# Altium PCB BlueBox-Amp.PcbDoc
Units mm, origin at the board's own origin, x right, y up, seen from the top; angles counter-clockwise.
Board outline 100 x 100 mm, 2 copper layers (Top Layer, Bottom Layer); 50 components, 36 nets, 135 pads, 0 vias.
Unrouted connection lines stored in the file: 93.
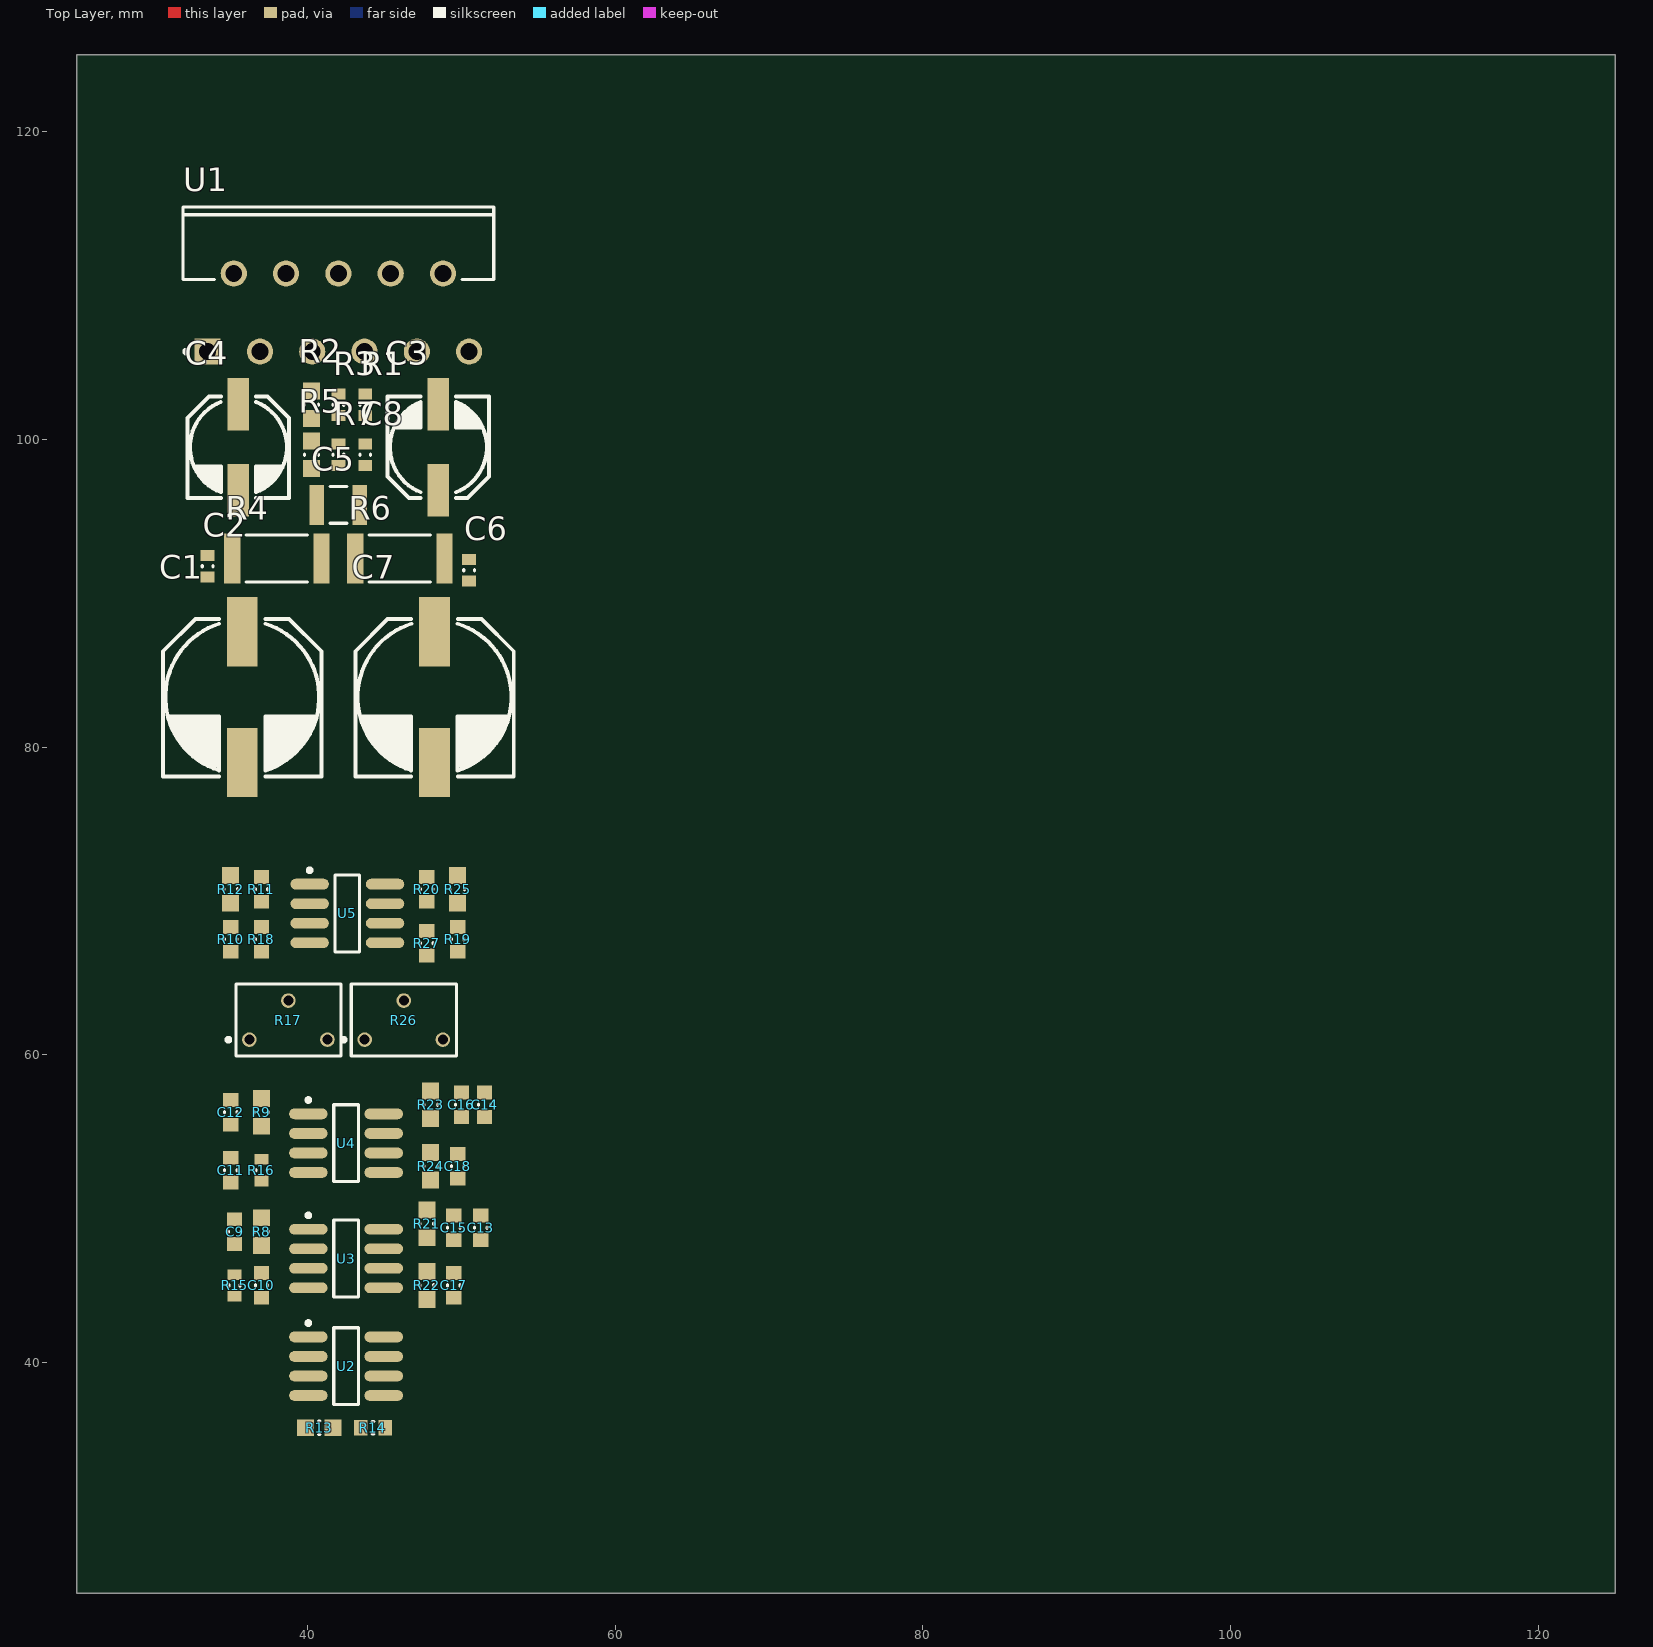
[diagram p0: Top Layer view]
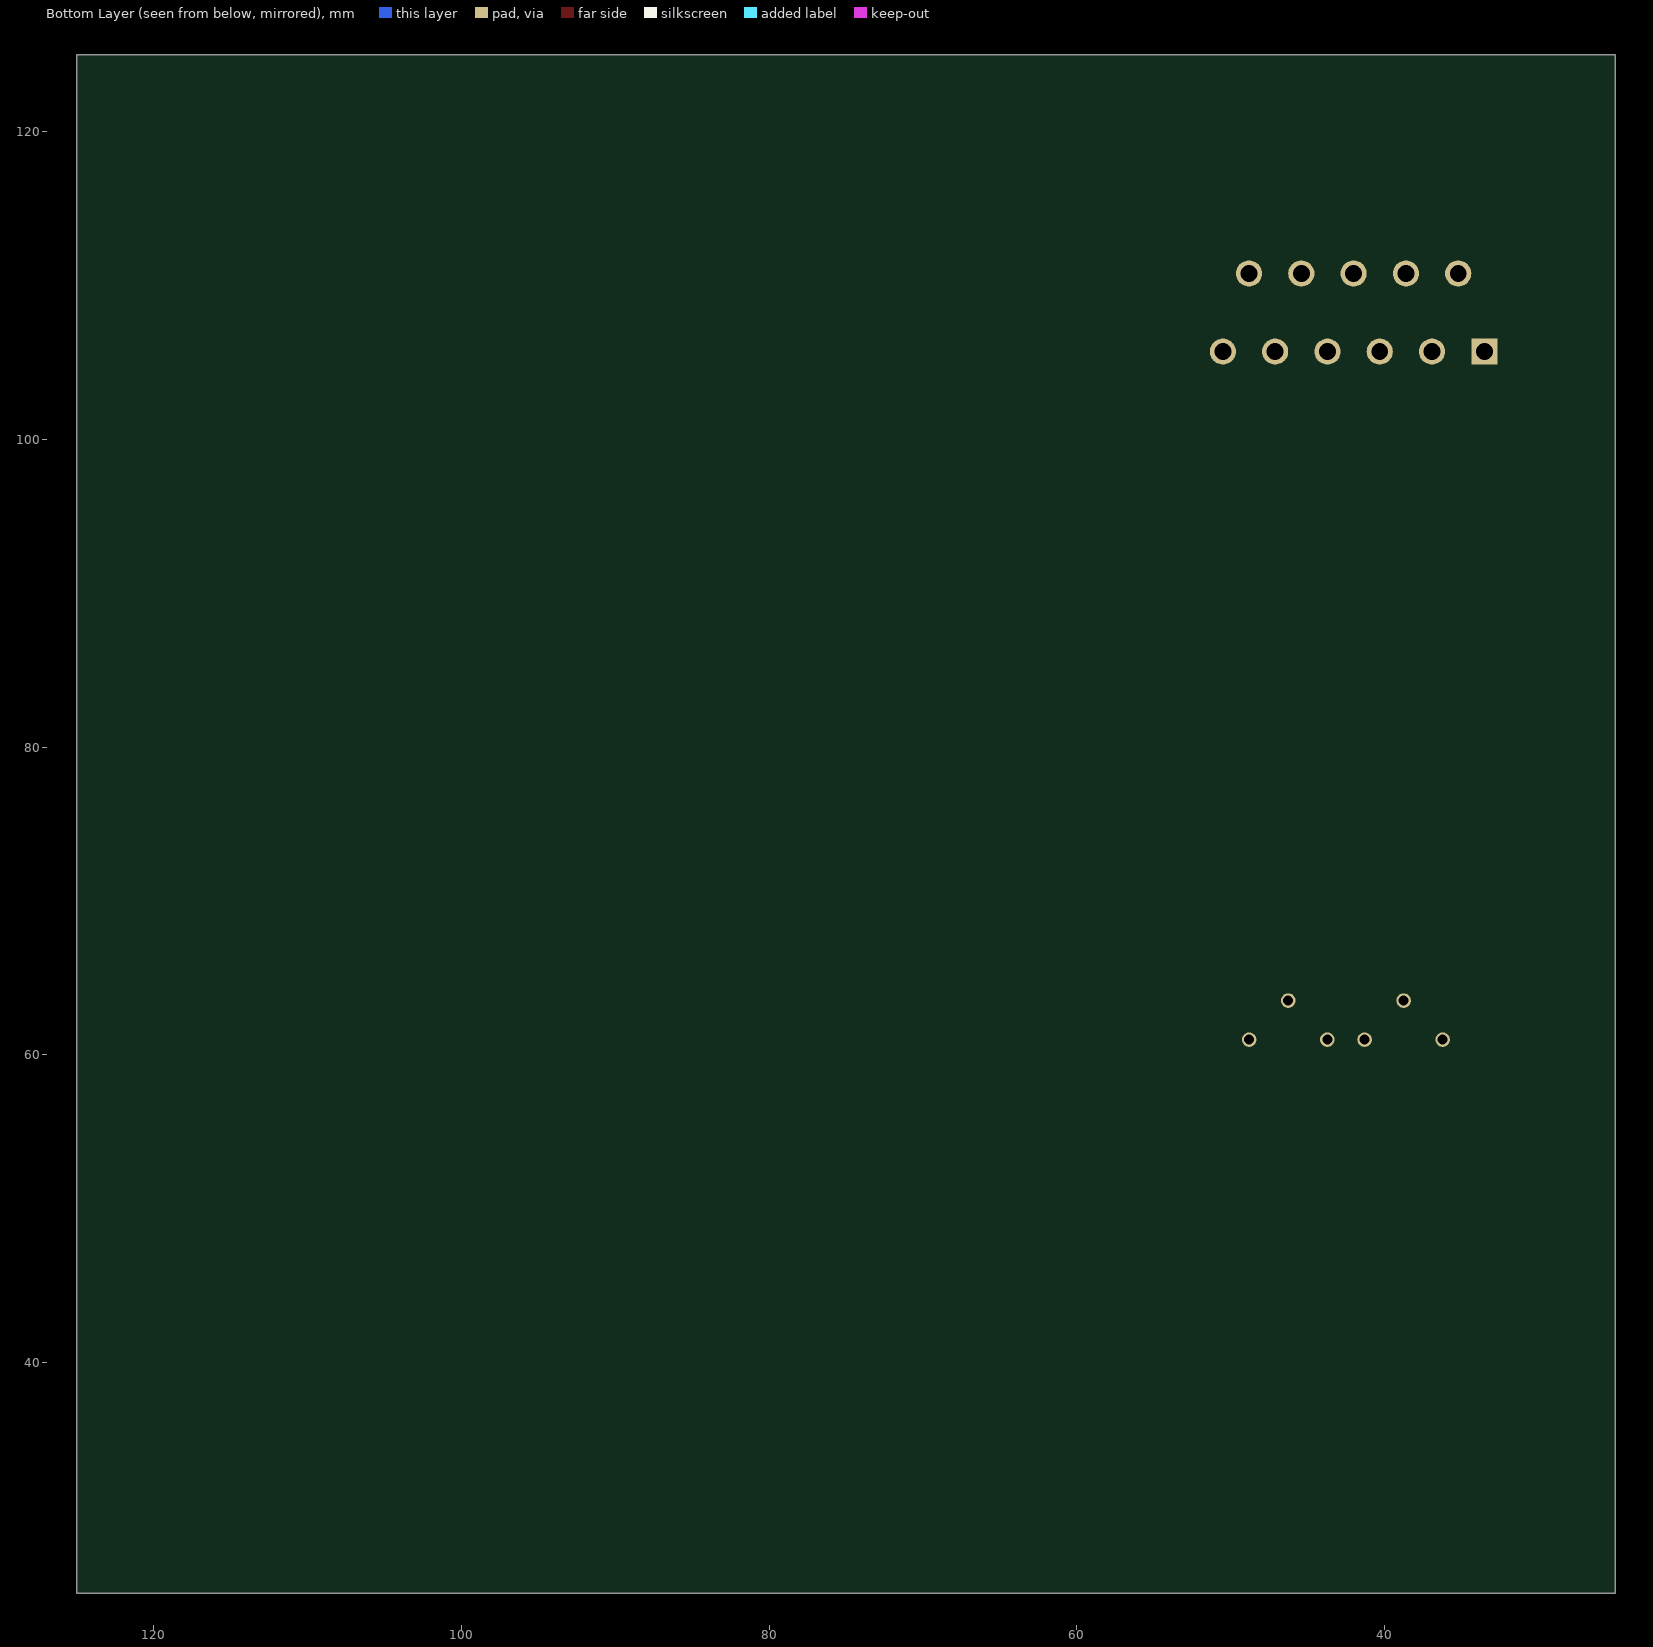
[diagram p1: Bottom Layer view, seen from below]

## Layer stack, top to bottom
Top Solder: solder mask 0.0102, Solder Resist, Dk 3.5
Top Layer: signal copper 0.0356
Dielectric 1: dielectric 0.32, FR-4, Dk 4.8
Bottom Layer: signal copper 0.0356
Bottom Solder: solder mask 0.0102, Solder Resist, Dk 3.5

## Board outline
25,25 125,25 125,125 25,125

## Design rules (kind name [scope] priority, off if disabled: settings)
Clearance [All] p1: gap=0.254
PolygonConnect [All] p1: connectstyle=Relief reliefconductorwidth=0.254 reliefentries=4 polygonreliefangle="90 Angle" airgapwidth=0.254
RoomDefinition "BlueBox-Amp [CrossOver]" [InComponentClass('BlueBox-Amp [CrossOver]')] p1: confinementstyle=ConfineIn formatcopy=TRUE lockcomponents=FALSE outline 31.75,33.5 53,33.5 53,73.5 31.75,73.5
RoomDefinition "BlueBox-Amp [PA]" [InComponentClass('BlueBox-Amp [PA]')] p2: confinementstyle=ConfineIn formatcopy=TRUE lockcomponents=FALSE outline 54.5,75.75 54.5,115.75 29.5,115.75 29.5,75.75
RoutingVias [All] p1: holewidth=0.711 width=1.27 viastyle="Through Hole" minholewidth=0.711 minwidth=1.27 maxholewidth=0.711 maxwidth=1.27
SolderMaskExpansion [All] p1: expansion=0.102
Width [All] p1: maxlimit=0.254 minlimit=0.254 preferedwidth=0.254
30 further rules are at their usual default settings.

## Classes and differential pairs
component class "BlueBox-Amp [PA]": C1 C2 C3 C4 C5 C6 C7 C8 R1 R2 R3 R4 R5 R6 R7 U1
component class "BlueBox-Amp [CrossOver]": C9 C10 C11 C12 C13 C14 C15 C16 C17 C18 R8 R9 R10 R11 R12 R13 R14 R17 R18 R19 R20 R21 R22 R23 R24 R25 R26 R27 U2 U3 U4 U5 U6

## Components (designator, comment, footprint, x,y, rotation, side; value= is the part's Value field where it differs from the comment)
C1 "220uF" "SMD Panasonic K" 35.75,83.25 r90 top
C2 "CAP 100nF 50V 0603(1608)" CAPC0603(1608)100_L 33.5,91.75 r270 top
C3 "22uF" "SMD Panasonic D" 48.5,99.5 r270 top
C4 "22uF" "SMD Panasonic D" 35.5,99.5 r90 top
C5 "CAP 3.3uF 50V 1210(3225)" CAPC1210(3225)280_L 42,95.75 r180 top
C6 "CAP 100nF 50V 0603(1608)" CAPC0603(1608)100_L 50.5,91.5 r270 top
C7 "220uF" "SMD Panasonic K" 48.25,83.25 r90 top
C8 "CAP 100nF 50V 0603(1608)" CAPC0603(1608)100_L 43.75,99 r90 top
C9 "CAP 33nF 50V 0603(1608)" CAPC0603(1608)100_N 35.25,48.5 r270 top
C10 "CAP 33nF 50V 0603(1608)" CAPC0603(1608)100_N 37,45 r270 top
C11 "CAP 33nF 50V 0603(1608)" CAPC0603(1608)100_N 35,52.5 r90 top
C12 "CAP 33nF 50V 0603(1608)" CAPC0603(1608)100_N 35,56.25 r270 top
C13 "CAP 33nF 50V 0603(1608)" CAPC0603(1608)100_N 51.25,48.75 r270 top
C14 "CAP 33nF 50V 0603(1608)" CAPC0603(1608)100_N 51.5,56.75 r270 top
C15 "CAP 33nF 50V 0603(1608)" CAPC0603(1608)100_N 49.5,48.75 r270 top
C16 "CAP 33nF 50V 0603(1608)" CAPC0603(1608)100_N 50,56.75 r270 top
C17 "CAP 33nF 50V 0603(1608)" CAPC0603(1608)100_N 49.5,45 r270 top
C18 "CAP 33nF 50V 0603(1608)" CAPC0603(1608)100_N 49.75,52.75 r270 top
R1 "22K 1% 0603(1608)" RESC0603(1608)_L 43.75,102.25 r90 top
R2 "1K 1% 0603(1608)" RESC0603(1608)_M 40.25,102.25 r270 top
R3 "22K 1% 0603(1608)" RESC0603(1608)_L 42,102.25 r90 top
R4 "10R 5% 2512(6432)" RESC2512(6432)_L 38,92.25 r180 top
R5 "1K 1% 0603(1608)" RESC0603(1608)_M 40.25,99 r90 top
R6 "2R7 5% 2512(6432)" RESC2512(6432)_L 46,92.25 r180 top
R7 "22K 1% 0603(1608)" RESC0603(1608)_L 42,99 r90 top
R8 "11K 1% 0603(1608)" RESC0603(1608)_M 37,48.5 r90 top
R9 "11K 1% 0603(1608)" RESC0603(1608)_M 37,56.25 r270 top
R10 "10K 1% 0603(1608)" RESC0603(1608)_N 35,67.5 r90 top
R11 "10K 1% 0603(1608)" RESC0603(1608)_N 37,70.75 r90 top
R12 "100R 1% 0603(1608)" RESC0603(1608)_M 35,70.75 r90 top
R13 "1K 1% 0603(1608)" RESC0603(1608)_M 40.75,35.75 r0 top
R14 "100K 1% 0603(1608)" RESC0603(1608)_N 44.25,35.75 r180 top
R15 "22K 1% 0603(1608)" RESC0603(1608)_L 35.25,45 r270 top
R16 "22K 1% 0603(1608)" RESC0603(1608)_L 37,52.5 r90 top
R17 "3266W-1-104LF" BOUR-3266W-3_V 38.75,62.25 r0 top
R18 "10K 1% 0603(1608)" RESC0603(1608)_N 37,67.5 r90 top
R19 "10K 1% 0603(1608)" RESC0603(1608)_N 49.75,67.5 r90 top
R20 "10K 1% 0603(1608)" RESC0603(1608)_N 47.75,70.75 r90 top
R21 "11K 1% 0603(1608)" RESC0603(1608)_M 47.75,49 r270 top
R22 "11K 1% 0603(1608)" RESC0603(1608)_M 47.75,45 r270 top
R23 "11K 1% 0603(1608)" RESC0603(1608)_M 48,56.75 r270 top
R24 "11K 1% 0603(1608)" RESC0603(1608)_M 48,52.75 r270 top
R25 "100R 1% 0603(1608)" RESC0603(1608)_M 49.75,70.75 r90 top
R26 "3266W-1-104LF" BOUR-3266W-3_V 46.25,62.25 r0 top
R27 "10K 1% 0603(1608)" RESC0603(1608)_N 47.75,67.25 r90 top
U1 "LM3886TF/NOPB" TI-NDA11 42,108.25 r90 top
U2 "NE5532D" TI-D8_M 42.5,39.75 r0 top
U3 "NE5532D" TI-D8_M 42.5,46.75 r0 top
U4 "NE5532D" TI-D8_M 42.5,54.25 r0 top
U5 "NE5532D" TI-D8_M 42.583,69.187 r0 top

## Footprints (in the part's own frame and the unit in brackets; to place one, negate y for a bottom-side part, rotate by r counter-clockwise, add the part's x,y. Pads: shape width x height; smd on the part's side, far side on the other; paste and mask are expansions set on the pad)
BOUR-3266W-3_V [mm] "THD, 3-Leads, Body 6.6x4.69mm, Pitch 2.54mm"
  round 0.95 hole 0.65: 1(-2.54,-1.27) 2(0,1.27) 3(2.54,-1.27)
  silkscreen extent -4.02,-2.34 3.42,2.34, body extent -3.3,-2.35 3.3,2.35, height 8.51
CAPC0603(1608)100_L [mm] "Chip Capacitor, Body 1.6x0.8mm, Height 1.0mm, IPC High Density"
  rect 0.7x0.9 smd: 1(-0.7,0) 2(0.7,0)
  silkscreen extent -0.05,-0.35 0.05,0.35, body extent -0.87,-0.47 0.88,0.48, height 1
CAPC0603(1608)100_N [mm] "Chip Capacitor, Body 1.6x0.8mm, Height 1.0mm, IPC Medium Density"
  rect 0.9x1 smd: 1(-0.8,0) 2(0.8,0)
  silkscreen extent -0.05,-0.4 0.05,0.4, body extent -0.87,-0.48 0.88,0.47, height 1
CAPC1210(3225)280_L [mm] "Chip Capacitor, Body 3.2x2.5mm, Height 2.8mm, IPC High Density"
  rect 0.95x2.6 smd: 1(-1.4,0) 2(1.4,0)
  silkscreen extent -0.55,-1.2 0.55,1.2, body extent -1.7,-1.4 1.7,1.4, height 2.8
RESC0603(1608)_L [mm] "Chip Resistor, Body 1.6x0.8mm, IPC High Density"
  rect 0.7x0.9 smd: 1(-0.7,0) 2(0.7,0)
  silkscreen extent -0.05,-0.35 0.05,0.35, body extent -0.85,-0.47 0.85,0.47, height 0.6
RESC0603(1608)_M [mm] "Chip Resistor, Body 1.6x0.8mm, IPC Low Density"
  rect 1.1x1.1 smd: 1(-0.9,0) 2(0.9,0)
  silkscreen extent -0.05,-0.45 0.05,0.45, body extent -0.85,-0.47 0.85,0.47, height 0.6
RESC0603(1608)_N [mm] "Chip Resistor, Body 1.6x0.8mm, IPC Medium Density"
  rect 0.9x1 smd: 1(-0.8,0) 2(0.8,0)
  silkscreen extent -0.05,-0.4 0.05,0.4, body extent -0.85,-0.47 0.85,0.47, height 0.6
RESC2512(6432)_L [mm] "Chip Resistor, Body 6.4x3.2mm, IPC High Density"
  rect 1.05x3.25 smd: 1(-2.9,0) 2(2.9,0)
  silkscreen extent -2,-1.52 2,1.53, body extent -3.25,-1.7 3.25,1.7, height 0.75
"SMD Panasonic D" [mm] "SMD Aluminum Electrolytic Capacitor,Panasonic D (105C), Body 6.3x5.3mm"
  rect 3.4x1.4 smd: 1(2.794,0) 2(-2.794,0)
  silkscreen extent -3.3,-3.3 3.3,3.3, body extent -3.5,-3.3 3.5,3.3, height 5.4
"SMD Panasonic K" [mm] "SMD Aluminum Electrolytic Capacitor,Panasonic K, Body 10.0x10.3mm"
  rect 4.5x2 smd: 1(4.25,0) 2(-4.25,0)
  silkscreen extent -5.15,-5.15 5.08,5.15, body extent -5.5,-5.2 5.5,5.2, height 10.41
TI-D8_M [mm] "SOIC, 8-Leads, Body 4.9x3.9mm, Pitch 1.27mm, IPC Low Density"
  oval 2.5x0.7 smd: 1(-2.45,1.905) 2(-2.45,0.635) 3(-2.45,-0.635) 4(-2.45,-1.905) 5(2.45,-1.905) 6(2.45,-0.635) 7(2.45,0.635) 8(2.45,1.905)
  silkscreen extent -2.57,-2.5 0.8,2.93, body extent -2,-2.5 2,2.5, height 1.75
TI-NDA11 [mm] "FM, 11-Leads, Body 20.02x4.5mm, Pitch 1.7mm"
  rect 1.7x1.7 hole 1.1: 1(-2.54,8.5)
  round 1.7 hole 1.1: 2(2.54,6.8) 3(-2.54,5.1) 4(2.54,3.4) 5(-2.54,1.7) 6(2.54,0) 7(-2.54,-1.7) 8(2.54,-3.4) 9(-2.54,-5.1) 10(2.54,-6.8) 11(-2.54,-8.5)
  silkscreen extent -2.66,-10.1 6.86,10.1, body extent -2.76,-10.07 6.83,10.08, height 23.02

## Part data
C1 C3 C4 C7: library part "Capacitor Polarized", "Polarized Capacitor"
C2 C6 C8: library part CMP-1035-02591-1, "CAP 100nF 50V ±5% 0603 (1608 Metric) Thickness 1mm SMD"
C5: library part CMP-1038-02126-1, "CAP 3.3uF 50V ±10% 1210 (3225 Metric) Thickness 2.8mm SMD"
C9 C10 C11 C12 C13 C14 C15 C16 C17 C18: library part CMP-1035-02468-1, "CAP 33nF 50V ±5% 0603 (1608 Metric) Thickness 1mm SMD"
R1 R3 R7 R15 R16: library part CMP-1012-00659-1, "22K 0.1W 1% 0603 (1608 Metric)  SMD"
R2 R5 R13: library part CMP-1012-00510-1, "1K 0.1W 1% 0603 (1608 Metric)  SMD"
R4: library part CMP-1018-00026-1, "10R 1W 5% 2512 (6432 Metric)  SMD"
R6: library part CMP-1018-00012-1, "2R7 1W 5% 2512 (6432 Metric)  SMD"
R8 R9 R21 R22 R23 R24: library part CMP-1012-00627-1, "11K 0.1W 1% 0603 (1608 Metric)  SMD"
R10 R11 R18 R19 R20 R27: library part CMP-1012-00623-1, "10K 0.1W 1% 0603 (1608 Metric)  SMD"
R12 R25: library part CMP-1012-00397-1, "100R 0.1W 1% 0603 (1608 Metric)  SMD"
R14: library part CMP-1012-00736-1, "100K 0.1W 1% 0603 (1608 Metric)  SMD"
R17 R26: library part CMP-0975-00021-1, "Square Trimpot Trimming Potentiometer, 100 KOhm, 0.25 W, -55 to 125 degC, 3-Pin THD, RoHS, Tube"
U1: library part CMP-0994-00114-1, "High-Performance 68 W Audio Power Amplifier with Mute, 0 to 70 degC, 11-pin FM (NDA11), Pb-Free (RoHS Exempt)"
U2 U3 U4 U5: library part CMP-0015-00060-1, "Dual Low-Noise High-Speed Audio Operational Amplifier, 10 to 30 V, 0 to 70 degC, 8-pin SOIC (D8), Green (RoHS & no Sb/Br)"

## Nets (pads, with @x,y where several pads share a name; then routed paths per layer and width w, separated by ;. In a path a pad name is that pad's centre, name@x,y a point inside that pad or via, vN(x,y) a via of type N, cw(c..) or ccw(c..) an arc to the next point about the centre after c; other vN are vias at no path point)
+15V: U2.8 U3.8 U4.8 U5.8
+35V: C1.1 C2.2 U1.1 U1.5
-15V: U2.4 U3.4 U4.4 U5.4
-35V: C6.2 C7.2 R1.1 U1.4
GND: C1.2 C2.1 C3.1 C4.2 C6.1 C7.1 C8.2 C17.1 C18.1 R7.2 R10.1 R14.1 R15.1 R16.1 R17.3 R18.2 R19.1 R26.3 R27.2 U1.7
NetC3_2: C3.2 R1.2 U1.8
NetC4_1: C4.1 R2.1
NetC5_1: C5.1 R13.1
NetC5_2: C5.2 R5.1 R7.1
NetC8_1: C8.1 R6.1
NetC9_1: C9.1 R21.1 U2.1 U2.2
NetC9_2: C9.2 C10.1 R8.1
NetC10_2: C10.2 R15.2 U3.3
NetC11_1: C11.1 R8.2 U3.1 U3.2
NetC11_2: C11.2 C12.1 R9.1
NetC12_2: C12.2 R16.2 U4.3
NetC13_1: C13.1 C15.1 R23.1 U3.6 U3.7
NetC13_2: C13.2 C15.2 R21.2 R22.1
NetC14_1: C14.1 C16.1 R26.1 U4.6 U4.7
NetC14_2: C14.2 C16.2 R23.2 R24.1
NetC17_2: C17.2 R22.2 U3.5
NetC18_2: C18.2 R24.2 U4.5
NetR2_2: R2.2 R3.1 U1.9
NetR3_2: R3.2 R4.1 R6.2 U1.3
NetR4_2: R4.2
NetR5_2: R5.2 U1.10
NetR9_2: R9.2 R17.1 U4.1 U4.2
NetR10_2: R10.2 R11.1 U5.2
NetR11_2: R11.2 R12.1 U5.1
NetR12_2: R12.2
NetR13_2: R13.2 R14.2 U2.3
NetR17_2: R17.2 R18.1 U5.3
NetR19_2: R19.2 R20.1 U5.6
NetR20_2: R20.2 R25.1 U5.7
NetR25_2: R25.2
NetR26_2: R26.2 R27.1 U5.5
pads on no net: U1.2 U1.6 U1.11 U2.5 U2.6 U2.7